# Altium PCB UPCNSL-ABS-PVC-DEP-1B.PcbDoc
Units mm, origin at the board's own origin, x right, y up, seen from the top; angles counter-clockwise.
Board outline 82 x 98.4 mm, 2 copper layers (Top Layer, Bottom Layer), stack 0.325 mm thick; 58 components, 56 nets, 158 pads, 38 vias.
Unrouted connection lines stored in the file: 8.
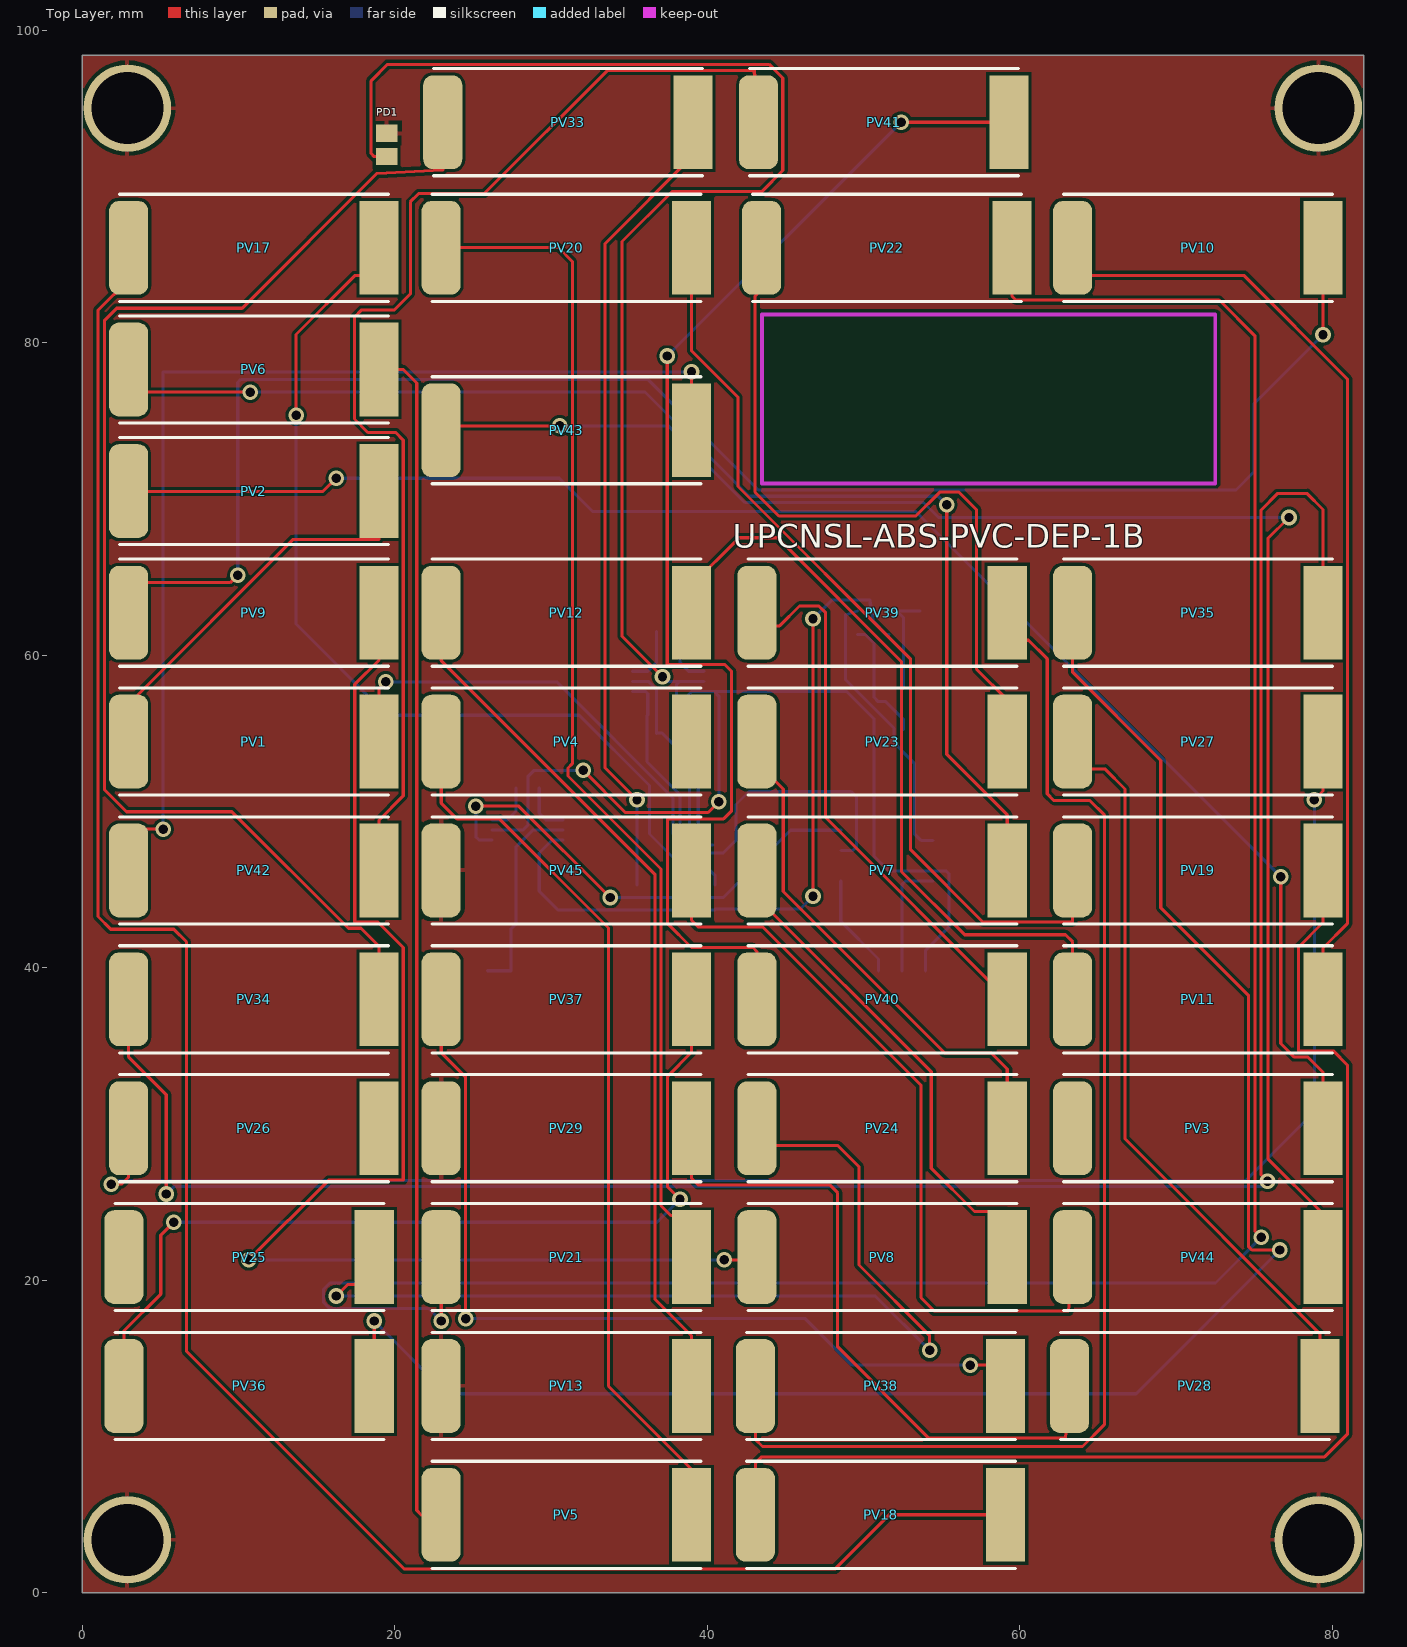
[diagram p0: Top Layer view]
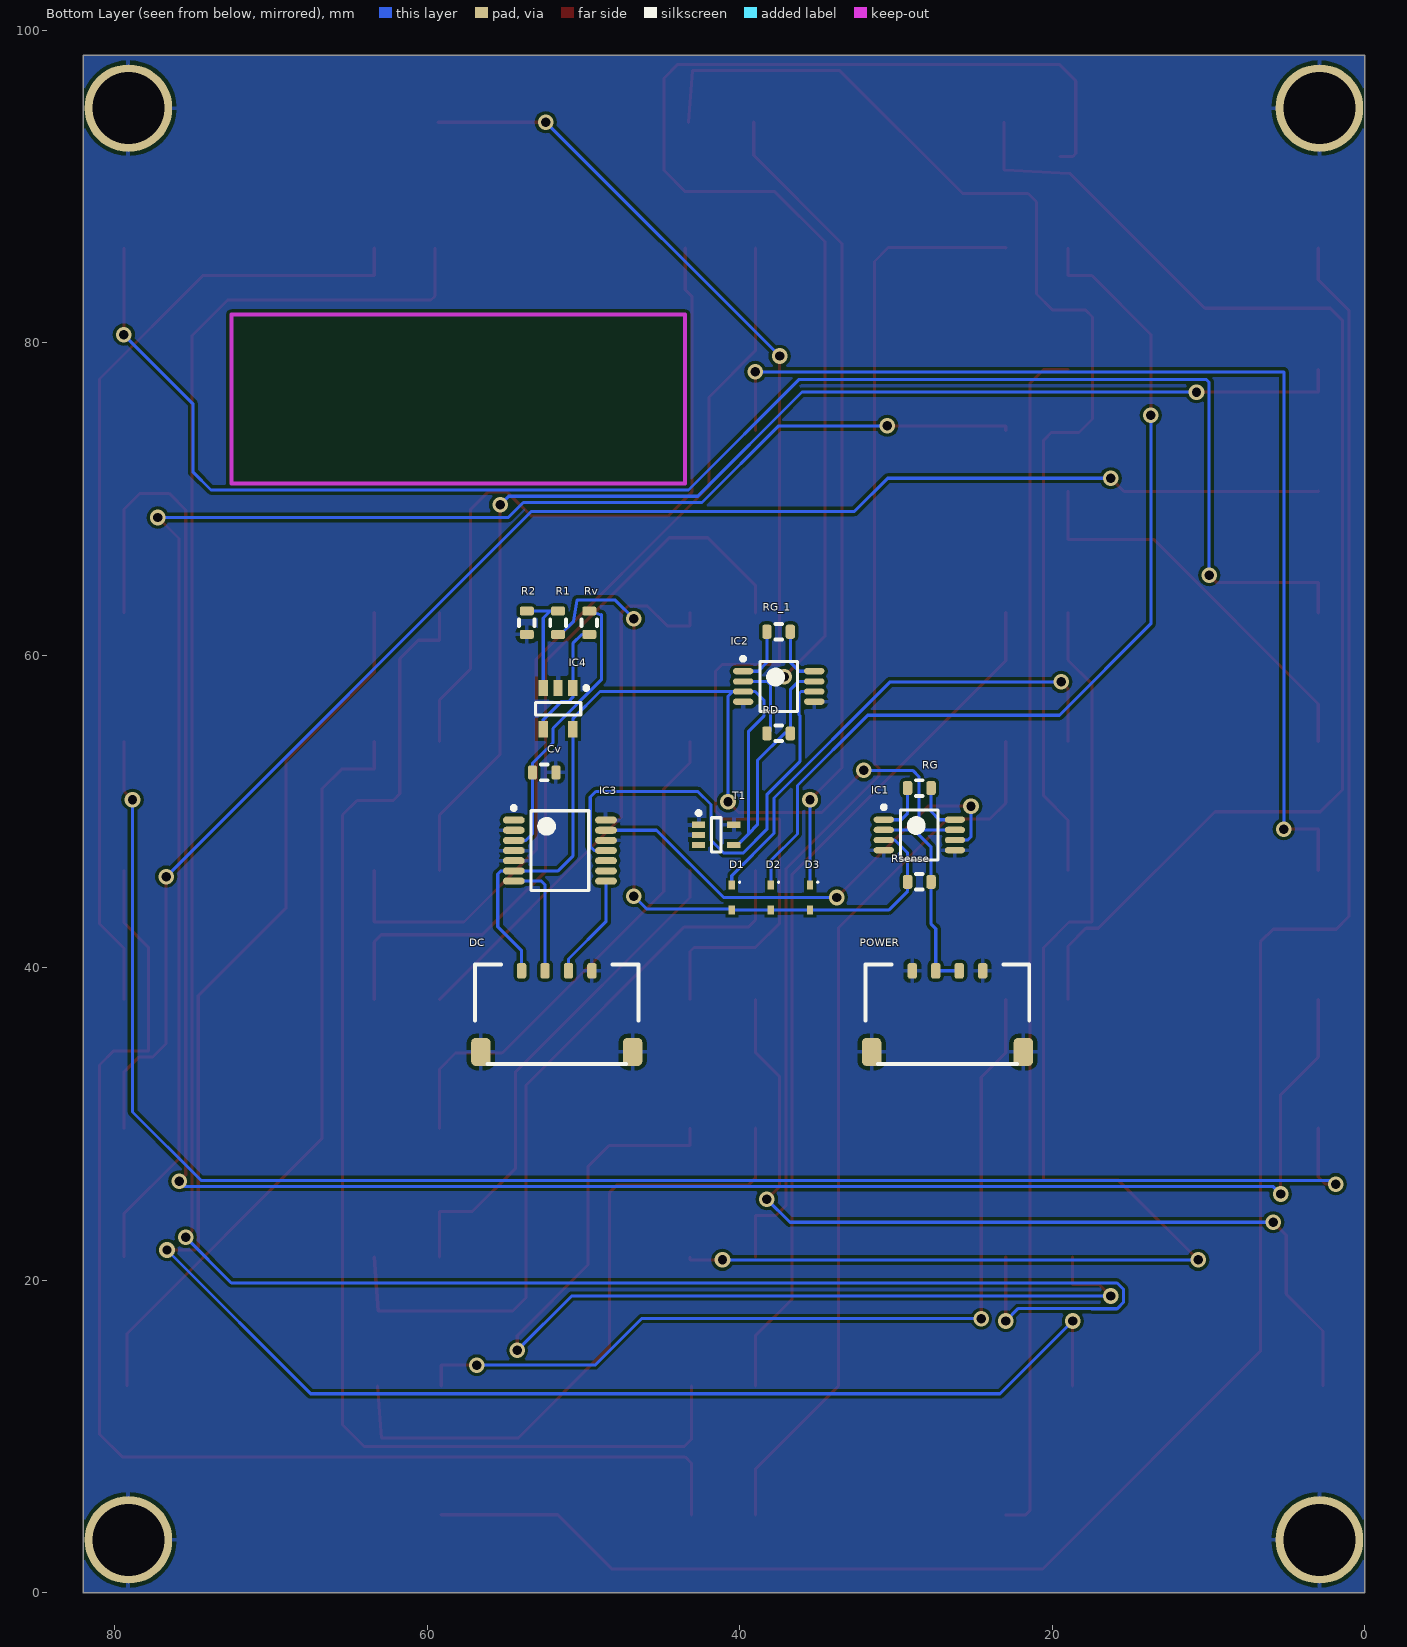
[diagram p1: Bottom Layer view, seen from below]
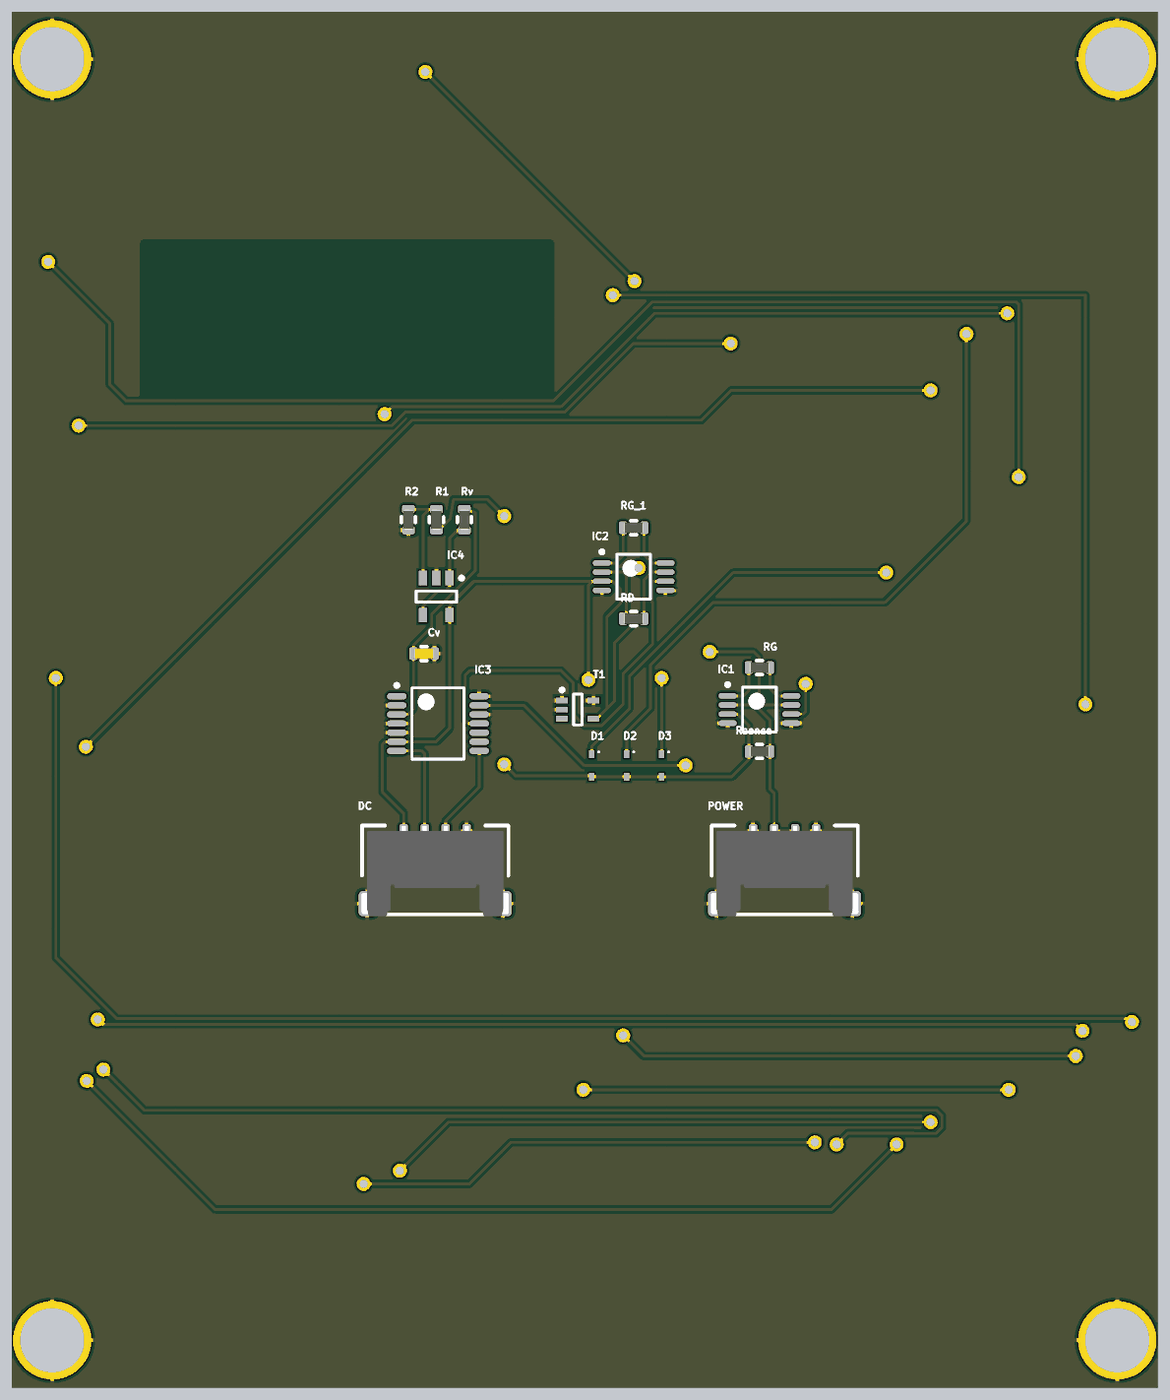
[diagram p2: 3D render of the assembled board from below, using the file's embedded part models]

## Layer stack, top to bottom
Top Solder: solder mask 0.0102, Solder Resist, Dk 3.5
Top Layer: signal copper 0.0356
Dielectric 1: core 0.254, FR-4, Dk 4.2
Bottom Layer: signal copper 0.0356
Bottom Solder: solder mask 0.0102, Solder Resist, Dk 3.5

## Board outline
0,0 82,0 82,98.4 0,98.4

## Design rules (kind name [scope] priority, off if disabled: settings)
Clearance [All] p1: gap=0.2
PolygonConnect [All] p1: connectstyle=Relief reliefconductorwidth=0.256 reliefentries=4 polygonreliefangle="90 Angle" airgapwidth=0.256
RoutingVias [All] p1: holewidth=0.6 width=1 viastyle="Through Hole" minholewidth=0.711 minwidth=1.27 maxholewidth=0.711 maxwidth=1.27
SolderMaskExpansion [All] p1: expansion=0.102
UnpouredPolygon [All] p1: allowunpoured=FALSE
Width [All] p1: maxlimit=1 minlimit=0.2 preferedwidth=0.2
29 further rules are at their usual default settings.

## Components (designator, comment, footprint, x,y, rotation, side; value= is the part's Value field where it differs from the comment)
Cv "CAP0603" CAP0603 52.5,52.5 r0 bottom
D1 "DIODE" "(Schottky diode) SODFL160X70-2N" 40.5,44.5 r270 bottom
D2 "DIODE" "(Schottky diode) SODFL160X70-2N" 38,44.5 r270 bottom
D3 "DIODE" "(Schottky diode) SODFL160X70-2N" 35.5,44.5 r270 bottom
DC "5040500491" 5040500491 51.7,34.619 r180 bottom
IC1 "AD623ARMZ" AD623ARMZ 28.5,48.5 r180 bottom
IC2 "AD623ARMZ" AD623ARMZ 37.5,58 r180 bottom
IC3 "MCP3424" MCP3424 51.5,47.5 r180 bottom
IC4 "AD8603" AD8603 51.616,56.577 r270 bottom
PD1 "Photo Sen" C0805 19.493,92.65 r270 top
POWER "5040500491" 5040500491 26.7,34.619 r180 bottom
PV1 "PVCELL" "PV CELLS" 11,54.473 r180 top
PV2 "PVCELL" "PV CELLS" 11,70.5 r180 top
PV3 "PVCELL" "PV CELLS" 71.4,29.736 r180 top
PV4 "PVCELL" "PV CELLS" 31,54.473 r180 top
PV5 "PVCELL" "PV CELLS" 31,5 r180 top
PV6 "PVCELL" "PV CELLS" 11,78.282 r180 top
PV7 "PVCELL" "PV CELLS" 51.2,46.227 r180 top
PV8 "PVCELL" "PV CELLS" 51.2,21.491 r180 top
PV9 "PVCELL" "PV CELLS" 11,62.718 r180 top
PV10 "PVCELL" "PV CELLS" 71.4,86.064 r180 top
PV11 "PVCELL" "PV CELLS" 71.4,37.982 r180 top
PV12 "PVCELL" "PV CELLS" 31,62.718 r180 top
PV13 "PVCELL" "PV CELLS" 31,13.245 r180 top
PV17 "PVCELL" "PV CELLS" 11,86.064 r180 top
PV18 "PVCELL" "PV CELLS" 51.1,5 r180 top
PV19 "PVCELL" "PV CELLS" 71.4,46.227 r180 top
PV20 "PVCELL" "PV CELLS" 31,86.064 r180 top
PV21 "PVCELL" "PV CELLS" 31,21.491 r180 top
PV22 "PVCELL" "PV CELLS" 51.5,86.064 r180 top
PV23 "PVCELL" "PV CELLS" 51.2,54.473 r180 top
PV24 "PVCELL" "PV CELLS" 51.2,29.736 r180 top
PV25 "PVCELL" "PV CELLS" 10.7,21.491 r180 top
PV26 "PVCELL" "PV CELLS" 11,29.736 r180 top
PV27 "PVCELL" "PV CELLS" 71.4,54.473 r180 top
PV28 "PVCELL" "PV CELLS" 71.2,13.245 r180 top
PV29 "PVCELL" "PV CELLS" 31,29.736 r180 top
PV33 "PVCELL" "PV CELLS" 31.1,94.1 r180 top
PV34 "PVCELL" "PV CELLS" 11,37.982 r180 top
PV35 "PVCELL" "PV CELLS" 71.4,62.718 r180 top
PV36 "PVCELL" "PV CELLS" 10.7,13.245 r180 top
PV37 "PVCELL" "PV CELLS" 31,37.982 r180 top
PV38 "PVCELL" "PV CELLS" 51.1,13.245 r180 top
PV39 "PVCELL" "PV CELLS" 51.2,62.718 r180 top
PV40 "PVCELL" "PV CELLS" 51.2,37.982 r180 top
PV41 "PVCELL" "PV CELLS" 51.3,94.1 r180 top
PV42 "PVCELL" "PV CELLS" 11,46.227 r180 top
PV43 "PVCELL" "PV CELLS" 31,74.391 r180 top
PV44 "PVCELL" "PV CELLS" 71.4,21.491 r180 top
PV45 "PVCELL" "PV CELLS" 31,46.227 r180 top
R1 "RES0603" RES0603 51.616,62.077 r270 bottom
R2 "RES0603" RES0603 53.616,62.077 r90 bottom
RD "RES0603" RES0603 37.5,55 r180 bottom
RG "RES0603" RES0603 28.5,51.5 r180 bottom
RG_1 "RES0603" RES0603 37.5,61.5 r180 bottom
Rsense "RES0603" RES0603 28.5,45.5 r0 bottom
Rv "RES0603" RES0603 49.616,62.077 r90 bottom
T1 "LMT84 DCK" DCK/SOT65P210X110-5N 41.5,48.5 r180 bottom

## Footprints (in the part's own frame and the unit in brackets; to place one, negate y for a bottom-side part, rotate by r counter-clockwise, add the part's x,y. Pads: shape width x height; smd on the part's side, far side on the other; paste and mask are expansions set on the pad)
5040500491 [mm] "1.50mm Pitch Pico-Lock™ Surface Mount Wire-to-Board Header, Right Angle,2.00mm Mated Height, Positive Side Locks, 4 Circuits"
  rrect50% 1.25x1.8 smd: 0(-4.855,0) 0(4.855,0)
  rrect50% 0.6x1 smd: 1(-2.25,5.19) 2(-0.75,5.19) 3(0.75,5.19) 4(2.25,5.19)
  silkscreen extent -5.23,-0.76 5.23,5.59, body extent -5.27,-0.9 5.28,5.54, height 1.98
"(Schottky diode) SODFL160X70-2N" [mm] "SODFL, 2-Leads, Body 0,80x1,60mm, IPC Medium Density"
  rect 0.55x0.4 smd: A(-0.8,0) K(0.8,0)
  silkscreen extent -1.02,0.45 -0.93,0.55, body extent -0.65,-0.45 0.65,0.45, height 0.7
AD623ARMZ [mm] "Single-Supply, Rail-to-Rail, Instrumentation Amplifier"
  oval 1.3x0.4 smd: 1(-2.275,0.975) 2(-2.275,0.325) 3(-2.275,-0.325) 4(-2.275,-0.975) 5(2.275,-0.975) 6(2.275,-0.325) 7(2.275,0.325) 8(2.275,0.975)
  silkscreen extent -2.4,-1.6 1.2,1.9, body extent -1.6,-1.6 1.6,1.6, height 1.1
AD8603 [mm] "SOT23, 5-Leads, Body 2,90x2,80mm, Pitch 0,95mm, IPC Medium Density"
  rect 1.05x0.6 smd: 1(-1.325,0.95) 2(-1.325,0) 3(-1.325,-0.95) 4(1.325,-0.95) 5(1.325,0.95)
  silkscreen extent -1.45,-1.45 0.4,1.92, body extent -0.8,-1.45 0.8,1.45, height 1
C0805 [mm] "Chip Capacitor, Body 2.0x1.3mm, IPC High Density"
  rect 1.1x1.4 smd: 1(-0.75,0) 2(0.75,0)
  body extent -1.1,-0.72 1.1,0.72, height 1.4
CAP0603 [mm] "Capacitor Chip Inductor, Body 0.6x0.3mm, IPC High Density"
  rrect50% 0.6x0.9 smd: 1(-0.75,0) 2(0.75,0)
  silkscreen extent -0.2,-0.5 0.2,0.5, body extent -0.76,-0.38 0.76,0.38, height 0.76
DCK/SOT65P210X110-5N [mm] "SOT23, 5-Leads, Body 2,00x2,10mm, Pitch 0,65mm, IPC Medium Density"
  rect 0.85x0.4 smd: 1(-1.125,0.65) 2(-1.125,0) 3(-1.125,-0.65) 4(1.125,-0.65) 5(1.125,0.65)
  silkscreen extent -1.25,-1.1 0.3,1.52, body extent -0.7,-1.07 0.7,1.08, height 1.1
MCP3424 [mm] "18-Bit, Multi-Channel ?S Analog-to-Digital Converter with  I2C"
  oval 1.4x0.45 smd: 1(-2.95,1.95) 2(-2.95,1.3) 3(-2.95,0.65) 4(-2.95,0) 5(-2.95,-0.65) 6(-2.95,-1.3) 7(-2.95,-1.95) 8(2.95,-1.95) 9(2.95,-1.3) 10(2.95,-0.65) 11(2.95,0) 12(2.95,0.65) 13(2.95,1.3) 14(2.95,1.95)
  silkscreen extent -3.08,-2.55 1.85,2.85, body extent -2.25,-2.55 2.25,2.55, height 1.2
"PV CELLS" [mm] "IXYS KXOB22-12X1L-ND"
  rect 2.5x6 smd: 1(-7.993,0)
  rrect50% 2.5x6 smd: 2(8.025,0)
  silkscreen extent -8.6,-3.43 8.6,3.43, body extent -8.97,-3.5 9.03,3.5, height 1.8
RES0603 [mm] "Resistor Chip Inductor, Body 0.6x0.3mm, IPC High Density"
  rrect50% 0.6x0.9 smd: 1(-0.75,0) 2(0.75,0)
  silkscreen extent -0.2,-0.5 0.2,0.5, body extent -0.76,-0.38 0.76,0.38, height 0.76

## Part data
Cv: "Capacitor"
DC POWER: library part MOLEX_5040500491, "1.50mm Pitch Pico-Lock™ Surface Mount Wire-to-Board Header, Right Angle,2.00mm Mated Height, Positive Side Locks, 4 Circuits"
IC3: "18-Bit, Multi-Channel ?S Analog-to-Digital Converter with  I2C"
PD1: "Photosensitive Diode"
PV1 PV2 PV3 PV4 PV5 PV6 PV7 PV8 PV9 PV10 PV11 PV12 PV13 PV17 PV18 PV19 PV20 PV21 PV22 PV23 PV24 PV25 PV26 PV27 PV28 PV29 PV33 PV34 PV35 PV36 PV37 PV38 PV39 PV40 PV41 PV42 PV43 PV44 PV45: library part PVCELLS, "IXYS KXOB22-12X1L-ND"
R1 R2 RD RG RG_1 Rsense Rv: "Resistor"

## Free pads (board coordinates)
  round 5.6 hole 4.6: 0(2.9,95) 1(79.1,95) 2(79.1,3.4) 3(2.9,3.4)

## Via types
v1: diameter 1, hole 0.6, Top Layer to Bottom Layer, 38 vias

## Nets (pads, with @x,y where several pads share a name; then routed paths per layer and width w, separated by ;. In a path a pad name is that pad's centre, name@x,y a point inside that pad or via, vN(x,y) a via of type N, cw(c..) or ccw(c..) an arc to the next point about the centre after c; other vN are vias at no path point)
5V: DC.1 IC1.7 IC2.3 IC2.7 IC3.6 IC4.5 RD.2 T1.4 | length 83
  Top Layer w0.2: v1(32.055,52.629) 34.747,49.936 40.056,49.936 v1(40.742,50.622)
  Bottom Layer w0.2: IC1.7 28.219,48.825 28.524,49.13 28.524,52.222 28.931,52.629 v1(32.055,52.629) ; IC2.7 36.225,58.325 36.75,57.8 RD.2@36.75,55.016 ; RD.2 RD.2@36.75,55.016 ; T1.4 40.157,47.85 39.421,48.587 ; v1(40.742,50.622) 40.742,57.37 40.437,57.675 ; DC.1 53.95,41.098 55.474,42.621 55.474,45.997 55.27,46.2 IC3.6 51.613,46.2 50.666,47.147 IC4.5 50.666,55.938 48.929,57.675 40.437,57.675 ; RD.2@36.75,55.016 37.109,55.016 38.862,53.264 38.862,49.145 39.421,48.587 ; 39.421,48.587 39.421,55.143 38.43,56.134 38.43,57.099 39.006,57.675 IC2.3 40.437,57.675
GND: Cv.1 DC.0 DC.4 IC1.4 IC1.5 IC2.4 IC2.5 IC3.2 IC3.4 IC3.5 IC3.12 IC3.14 IC4.2 pad.0 pad.1 pad.2 pad.3 PD1.1 POWER.0 POWER.1 POWER.4 PV13.2 PV29.2 PV45.2 R2.1 T1.1 T1.2 T1.5
IRR: IC2.6 IC3.11 | length 29.9
  Bottom Layer w0.2: IC2.6 36.068,57.675 36.195,57.548 36.195,56.185 36.144,56.134 36.144,53.188 38.252,51.079 38.252,48.855 39.762,47.346 41.021,47.346 41.834,48.158 41.834,50.444 42.672,51.283 49.2,51.283 49.555,50.927 49.555,47.752 49.303,47.5 IC3.11
ISENSE: IC1.6 IC3.13 | length 30.6
  Top Layer w0.2: v1(25.197,50.343) 27.94,50.343 v1(33.782,44.501)
  Bottom Layer w0.2: v1(25.197,50.343) 25.197,48.378 25.4,48.175 IC1.6 ; v1(33.782,44.501) 41.021,44.501 45.32,48.8 IC3.13
NetIC1_1: IC1.1 RG.1 | length 3.3
  Bottom Layer w0.2: RG.1 29.25,49.892 29.667,49.475 IC1.1
NetIC1_8: IC1.8 RG.2 | length 3.2
  Bottom Layer w0.2: IC1.8 27.229,49.475 27.75,49.996 RG.2
NetIC2_1: IC2.1 RG_1.1 | length 3.7
  Bottom Layer w0.2: RG_1.1 38.25,59.538 38.813,58.975 IC2.1
NetIC2_2: IC2.2 PD1.2 RD.1 | length 86.3
  Top Layer w0.2: PD1.2 18.694,91.9 18.491,92.103 18.491,96.749 19.543,97.8 43.957,97.8 44.831,96.926 44.831,91.008 43.485,89.662 37.742,89.662 34.544,86.464 34.544,61.214 v1(37.135,58.623)
  Bottom Layer w0.2: v1(37.135,58.623) 37.433,58.325 38.234,58.325 ; RD.1 38.25,55.143 38.024,55.143 38.024,58.115 38.234,58.325 ; IC2.2 38.234,58.325
NetIC2_8: IC2.8 RG_1.2 | length 3.7
  Bottom Layer w0.2: IC2.8 36.187,58.975 36.75,59.538 RG_1.2
NetPV1_2: PV1.2 PV2.1 | length 25.9
  Top Layer w0.2: PV1.2 2.975,56.874 13.513,67.412 18.993,67.412 PV2.1
NetPV2_2: PV2.2 PV3.1 | length 102.4
  Top Layer w0.2: PV2.2 2.975,70.485 15.418,70.485 v1(16.256,71.323) ; v1(76.691,45.833) 76.691,35.154 77.563,34.282 78.435,34.282 79.393,33.324 PV3.1
  Bottom Layer w0.2: v1(16.256,71.323) 30.531,71.323 32.664,69.19 53.334,69.19 v1(76.691,45.833)
NetPV3_2: PV3.2 PV4.1
NetPV4_2: PV4.2 PV5.1 | length 57.7
  Top Layer w0.2: PV4.2 22.975,50.532 23.978,49.53 26.695,49.53 33.68,42.545 33.68,13.238 38.993,7.925 PV5.1
NetPV5_2: PV5.2 PV6.1 | length 76.6
  Top Layer w0.2: PV6.1 20.549,78.283 21.412,77.419 21.412,5.283 21.717,4.978 22.975,4.978 PV5.2
NetPV6_2: PV6.2 PV7.1 | length 81.8
  Top Layer w0.2: PV6.2 2.975,76.835 v1(10.77,76.835) ; v1(55.321,69.621) 55.321,53.656 59.193,49.784 PV7.1
  Bottom Layer w0.2: v1(10.77,76.835) 36.011,76.835 42.673,70.173 54.77,70.173 v1(55.321,69.621)
NetPV7_2: PV7.2 PV8.1 | length 32.6
  Top Layer w0.2: PV7.2 43.175,44.501 54.331,33.345 54.331,27.178 57.099,24.409 59.193,24.409 PV8.1
NetPV9_2: PV9.2 PV10.1 | length 106.1
  Top Layer w0.2: PV9.2 2.975,64.643 9.474,64.643 v1(9.957,65.126) ; v1(79.393,80.511) PV10.1
  Bottom Layer w0.2: v1(9.957,65.126) 9.957,77.445 10.16,77.648 36.195,77.648 43.27,70.573 73.824,70.573 74.981,71.73 74.981,76.098 v1(79.393,80.511)
NetPV10_2: PV10.2 PV11.1 | length 62.4
  Top Layer w0.2: PV10.2 63.375,84.303 74.32,84.303 80.95,77.673 80.95,42.824 79.393,41.268 PV11.1
NetPV11_2: PV11.2 PV12.1 | length 49.6
  Top Layer w0.2: PV12.1 38.993,64.465 42.041,67.513 44.501,67.513 52.426,59.588 52.426,46.152 56.464,42.113 62.918,42.113 63.375,41.656 PV11.2
NetPV12_2: PV12.2 PV13.1 | length 56.1
  Top Layer w0.2: PV12.2 22.975,59.651 36.643,45.983 36.643,18.809 38.993,16.459 PV13.1
NetPV17_2: PV17.2 PV18.1 | length 135.8
  Top Layer w0.2: PV17.2 2.975,84.027 1.016,82.067 1.016,43.282 1.829,42.469 5.867,42.469 6.68,41.656 6.68,15.469 20.625,1.524 48.158,1.524 51.638,5.004 59.093,5.004 PV18.1
NetPV18_2: PV18.2 PV19.1 | length 81.3
  Top Layer w0.2: PV18.2 43.075,8.299 43.485,8.709 79.499,8.709 80.95,10.16 80.95,33.782 80.05,34.682 77.826,34.682 77.826,41.326 79.393,42.893 PV19.1
NetPV19_2: PV19.2 PV20.1 | length 59.9
  Top Layer w0.2: PV20.1 38.993,79.472 41.961,76.505 41.961,70.79 53.01,59.741 53.01,47.549 57.633,42.926 63.375,42.926 PV19.2
NetPV20_2: PV20.2 PV21.1 | length 76.6
  Top Layer w0.2: PV20.2 22.975,86.081 30.48,86.081 31.369,85.192 31.369,53.061 31.09,52.781 31.09,52.273 37.043,46.32 37.043,24.78 37.668,24.155 38.993,24.155 PV21.1
NetPV21_2: PV21.2 PV22.1 | length 151.9
  Top Layer w0.2: v1(22.975,17.399) PV21.2 ; PV22.1 59.493,82.976 59.741,82.728 72.746,82.728 75.038,80.435 75.038,23.158 v1(75.438,22.758)
  Bottom Layer w0.2: v1(22.975,17.399) 22.162,18.212 17.501,18.212 17.475,18.186 15.85,18.186 15.443,18.593 15.443,19.431 15.85,19.837 72.517,19.837 v1(75.438,22.758)
NetPV22_2: PV22.2 PV23.1 | length 47.4
  Top Layer w0.2: PV22.2 43.475,83.388 43.053,82.966 43.053,70.434 44.577,68.91 53.34,68.91 54.864,70.434 56.109,70.434 57.226,69.317 57.226,59.106 59.193,57.139 PV23.1
NetPV23_2: PV23.2 PV24.1 | length 33.1
  Top Layer w0.2: PV23.2 43.175,53.116 44.856,51.435 44.856,44.882 55.194,34.544 58.177,34.544 59.193,33.528 PV24.1
NetPV25_2: PV25.2 PV26.1
NetPV26_2: PV26.2 PV27.1 | length 107.3
  Top Layer w0.2: v1(1.854,26.162) 2.518,26.162 2.975,26.619 PV26.2 ; v1(78.842,50.756) 79.393,51.308 PV27.1
  Bottom Layer w0.2: v1(1.854,26.162) 2.089,26.397 74.465,26.397 78.842,30.774 v1(78.842,50.756)
NetPV27_2: PV27.2 PV28.1 | length 49
  Top Layer w0.2: PV27.2 63.375,52.73 65.43,52.73 66.726,51.435 66.726,29.053 79.193,16.586 PV28.1
NetPV28_2: PV28.2 PV29.1 | length 43.1
  Top Layer w0.2: PV29.1 38.993,26.539 39.421,26.111 47.828,26.111 48.336,25.603 48.336,15.748 54.178,9.906 62.921,9.906 PV28.2
NetPV33_2: PV33.2 PV34.1 | length 83.7
  Top Layer w0.2: PV34.1 18.993,41.377 17.843,42.527 17.043,42.527 9.583,49.987 2.845,49.987 1.422,51.41 1.422,81.407 2.21,82.194 10.236,82.194 18.872,90.83 23.075,91.034 PV33.2
NetPV34_2: PV34.2 PV35.1 | length 138.8
  Top Layer w0.2: PV34.2 2.975,34.287 5.385,31.877 v1(5.385,25.527) ; v1(75.844,26.34) 75.438,26.746 75.438,69.291 76.502,70.355 78.362,70.355 79.393,69.324 PV35.1
  Bottom Layer w0.2: v1(5.385,25.527) 5.855,25.997 75.501,25.997 v1(75.844,26.34)
NetPV35_2: PV35.2 PV36.1 | length 115.1
  Top Layer w0.2: PV36.1 v1(18.693,17.399) ; PV35.2 63.375,58.903 69.012,53.266 69.012,43.84 74.638,38.214 74.638,22.149 74.841,21.946 v1(76.632,21.946)
  Bottom Layer w0.2: v1(18.693,17.399) 23.341,12.751 67.437,12.751 v1(76.632,21.946)
NetPV36_2: PV36.2 PV37.1 | length 58.6
  Top Layer w0.2: PV36.2 2.675,16.764 5.029,19.118 5.029,22.885 v1(5.867,23.724) ; v1(38.252,25.197) 37.443,26.006 37.443,33.036 38.993,34.586 PV37.1
  Bottom Layer w0.2: v1(5.867,23.724) 36.779,23.724 v1(38.252,25.197)
NetPV37_2: PV37.2 PV38.1 | length 58.2
  Top Layer w0.2: PV37.2 22.975,34.556 24.536,32.995 v1(24.536,17.551) ; v1(56.82,14.58) 59.093,14.58 PV38.1
  Bottom Layer w0.2: v1(24.536,17.551) 46.279,17.551 49.251,14.58 v1(56.82,14.58)
NetPV38_2: PV38.2 PV39.1 | length 83.2
  Top Layer w0.2: PV38.2 43.075,9.83 43.532,9.373 64.008,9.373 65.405,10.77 65.405,49.784 64.491,50.698 62.179,50.698 61.747,51.13 61.747,59.766 60.554,60.96 59.193,60.96 PV39.1
NetPV39_2: PV39.2 PV40.1 | length 35.5
  Top Layer w0.2: PV39.2 43.175,61.874 44.628,61.874 45.898,63.144 47.142,63.144 47.574,62.713 47.574,49.617 59.193,37.998 PV40.1
NetPV41_2: PV41.2 PV42.1 | length 77.3
  Top Layer w0.2: PV42.1 18.993,49.448 20.549,51.003 20.549,73.762 20.066,74.244 18.288,74.244 17.424,75.108 17.424,81.636 17.882,82.093 19.99,82.093 21.006,83.109 21.006,89.002 21.539,89.535 25.73,89.535 33.595,97.4 43.005,97.4 PV41.2
NetPV42_2: PV42.2 PV43.1 | length 71.6
  Top Layer w0.2: PV42.2 2.975,48.87 v1(5.182,48.87) ; PV43.1 v1(38.993,78.13)
  Bottom Layer w0.2: v1(5.182,48.87) 5.182,78.105 5.207,78.13 v1(38.993,78.13)
NetPV43_2: PV43.2 PV44.1 | length 106.3
  Top Layer w0.2: PV43.2 22.975,74.676 v1(30.556,74.676) ; v1(77.216,68.809) 75.87,67.462 75.87,27.788 79.393,24.264 PV44.1
  Bottom Layer w0.2: v1(30.556,74.676) 37.504,74.676 42.407,69.773 53.836,69.773 54.801,68.809 v1(77.216,68.809)
NetPV44_2: PV44.2 PV45.1 | length 49.1
  Top Layer w0.2: PV45.1 38.993,43.049 39.421,42.621 43.536,42.621 53.67,32.487 53.67,18.898 54.534,18.034 63.121,18.034 PV44.2
PV9: PV8.2 PV9.1 | length 83.8
  Top Layer w0.2: v1(10.668,21.311) 15.773,26.416 20.549,26.416 20.549,41.3 18.922,42.927 17.443,42.927 17.443,58.134 18.993,59.684 PV9.1 ; v1(41.097,21.311) 43.175,21.311 PV8.2
  Bottom Layer w0.2: v1(10.668,21.311) v1(41.097,21.311)
PV25: PV24.2 PV25.1 | length 65.7
  Top Layer w0.2: v1(16.256,18.999) 16.993,19.736 18.693,19.736 PV25.1 ; PV24.2 43.175,28.626 48.362,28.626 49.708,27.28 49.708,20.98 54.229,16.459 v1(54.229,15.519)
  Bottom Layer w0.2: v1(16.256,18.999) 50.749,18.999 v1(54.229,15.519)
PV41: PV40.2 PV41.1 | length 81.5
  Top Layer w0.2: v1(37.44,79.139) 37.44,59.411 41.097,59.411 41.554,58.953 41.554,50.038 41.046,49.53 37.443,49.53 37.443,42.85 38.993,41.3 42.921,41.3 43.175,41.046 PV40.2 ; v1(52.4,94.1) PV41.1
  Bottom Layer w0.2: v1(37.44,79.139) v1(52.4,94.1)
SCL: DC.3 IC3.8 | length 6.8
  Bottom Layer w0.2: IC3.8 48.539,45.55 48.539,42.977 50.95,40.566 DC.3
SDA: DC.2 IC3.7 | length 7.6
  Bottom Layer w0.2: DC.2 52.45,45.314 52.686,45.55 IC3.7
TEMP: IC3.1
VCC: D1.K D2.K D3.K IC1.3 R1.2 Rsense.2 | length 47.3
  Top Layer w0.2: v1(46.761,44.577) v1(46.761,62.332)
  Bottom Layer w0.2: IC1.3 30.079,48.175 29.25,47.346 Rsense.2 29.25,44.907 30.469,43.688 35.5,43.688 D3.K 36.728,43.7 D2.K 39.243,43.7 D1.K 40.5,43.764 45.949,43.764 v1(46.761,44.577) ; v1(46.761,62.332) 47.955,63.525 50.394,63.525 50.622,62.165 51.46,61.327 R1.2
VCC_1: D1.A PV1.1 | length 32.1
  Top Layer w0.2: PV1.1 18.993,57.855 v1(19.431,58.293)
  Bottom Layer w0.2: v1(19.431,58.293) 30.369,58.293 37.798,50.864 37.798,48.6 40.5,45.898 D1.A
VCC_2: D2.A PV17.1 | length 61.1
  Top Layer w0.2: v1(13.691,75.362) 13.691,80.518 17.475,84.303 18.993,84.303 PV17.1
  Bottom Layer w0.2: v1(13.691,75.362) 13.691,62.001 19.533,56.159 31.804,56.159 36.3,51.664 36.3,48.563 38,46.863 D2.A
VCC_3: D3.A PV33.1 | length 52
  Top Layer w0.2: v1(35.5,50.749) 33.452,52.797 33.452,86.335 39.093,91.976 PV33.1
  Bottom Layer w0.2: D3.A v1(35.5,50.749)
VD: IC4.1 IC4.4 Rv.1 | length 7.9
  Bottom Layer w0.2: Rv.1 50.096,61.327 50.666,60.757 IC4.1 50.666,57.302 50.938,57.03 51.415,57.03 52.566,55.88 IC4.4
VDD: IC1.2 POWER.2 POWER.3 Rsense.1 | length 13
  Bottom Layer w0.2: POWER.3 POWER.2 27.45,42.494 27.75,42.794 Rsense.1 27.75,47.721 28.854,48.825 IC1.2
VDIV: IC4.3 R1.1 R2.2 | length 7.1
  Bottom Layer w0.2: R1.1 52.121,62.827 ; IC4.3 52.566,62.382 52.121,62.827 ; R2.2 52.121,62.827
VOLT: Cv.2 IC3.3 Rv.2 | length 18
  Bottom Layer w0.2: Rv.2 48.844,62.586 48.844,58.42 51.943,55.321 51.943,54.393 53.25,53.086 Cv.2 53.25,48.565 53.665,48.15 IC3.3
pads on no net: IC3.9 IC3.10 T1.3

## Polygon pours and split planes (outlines as drawn)
GND on Bottom Layer "Bottom" (solid, pour order 9): 0,0 0,98.4 82,98.4 82,0
GND on Top Layer "Top" (solid, pour order 13): 0,98.4 0,0 82,0 82,98.4

## Keep-outs
Keep-Out Layer:
  lines w0.254: 43.5,71 43.5,81.8 72.5,81.8 72.5,81.7 72.5,71 43.5,71

## Other copper
Top Layer:
  pour cut-out: 43.833,81.467 72.167,81.467 72.167,71.333 43.833,71.333
Bottom Layer:
  pour cut-out: 43.833,81.467 72.167,81.467 72.167,71.333 43.833,71.333

## Silkscreen, mask and mechanical layers (free items; w line width, h text height)
Top Overlay:
  text "UPCNSL-ABS-PVC-DEP-1B" at 41.625,66.875 h1.52
Mechanical 3:
  lines w0.254: 44,71.4 44,81.4 72,81.4 72,71.4 44,71.4
  lines w2: -1,0 ccw(c0,0) 0,-1 ; -1,0 ccw(c0,0) 0,-1 ; -1,0 -1,98.4 ; -1,98.4 cw(c0,98.4) 0,99.4 ; -1,98.4 cw(c0,98.4) 0,99.4 ; 0,-1 82,-1 ; 0,99.4 82,99.4 ; 82,-1 ccw(c82,0) 83,0 ; 82,-1 ccw(c82,0) 83,0 ; 82,99.4 cw(c82,98.4) 83,98.4 ; 82,99.4 cw(c82,98.4) 83,98.4 ; 83,0 83,1 83,98.4